# Altium PCB PCB.PcbDoc (part 2 of 2)
Units mm, origin at the board's own origin, x right, y up, seen from the top; angles counter-clockwise.
Board outline 65 x 70 mm, 2 copper layers (Top Layer, Bottom Layer), stack 0.325 mm thick; 95 components, 63 nets, 365 pads, 289 vias.
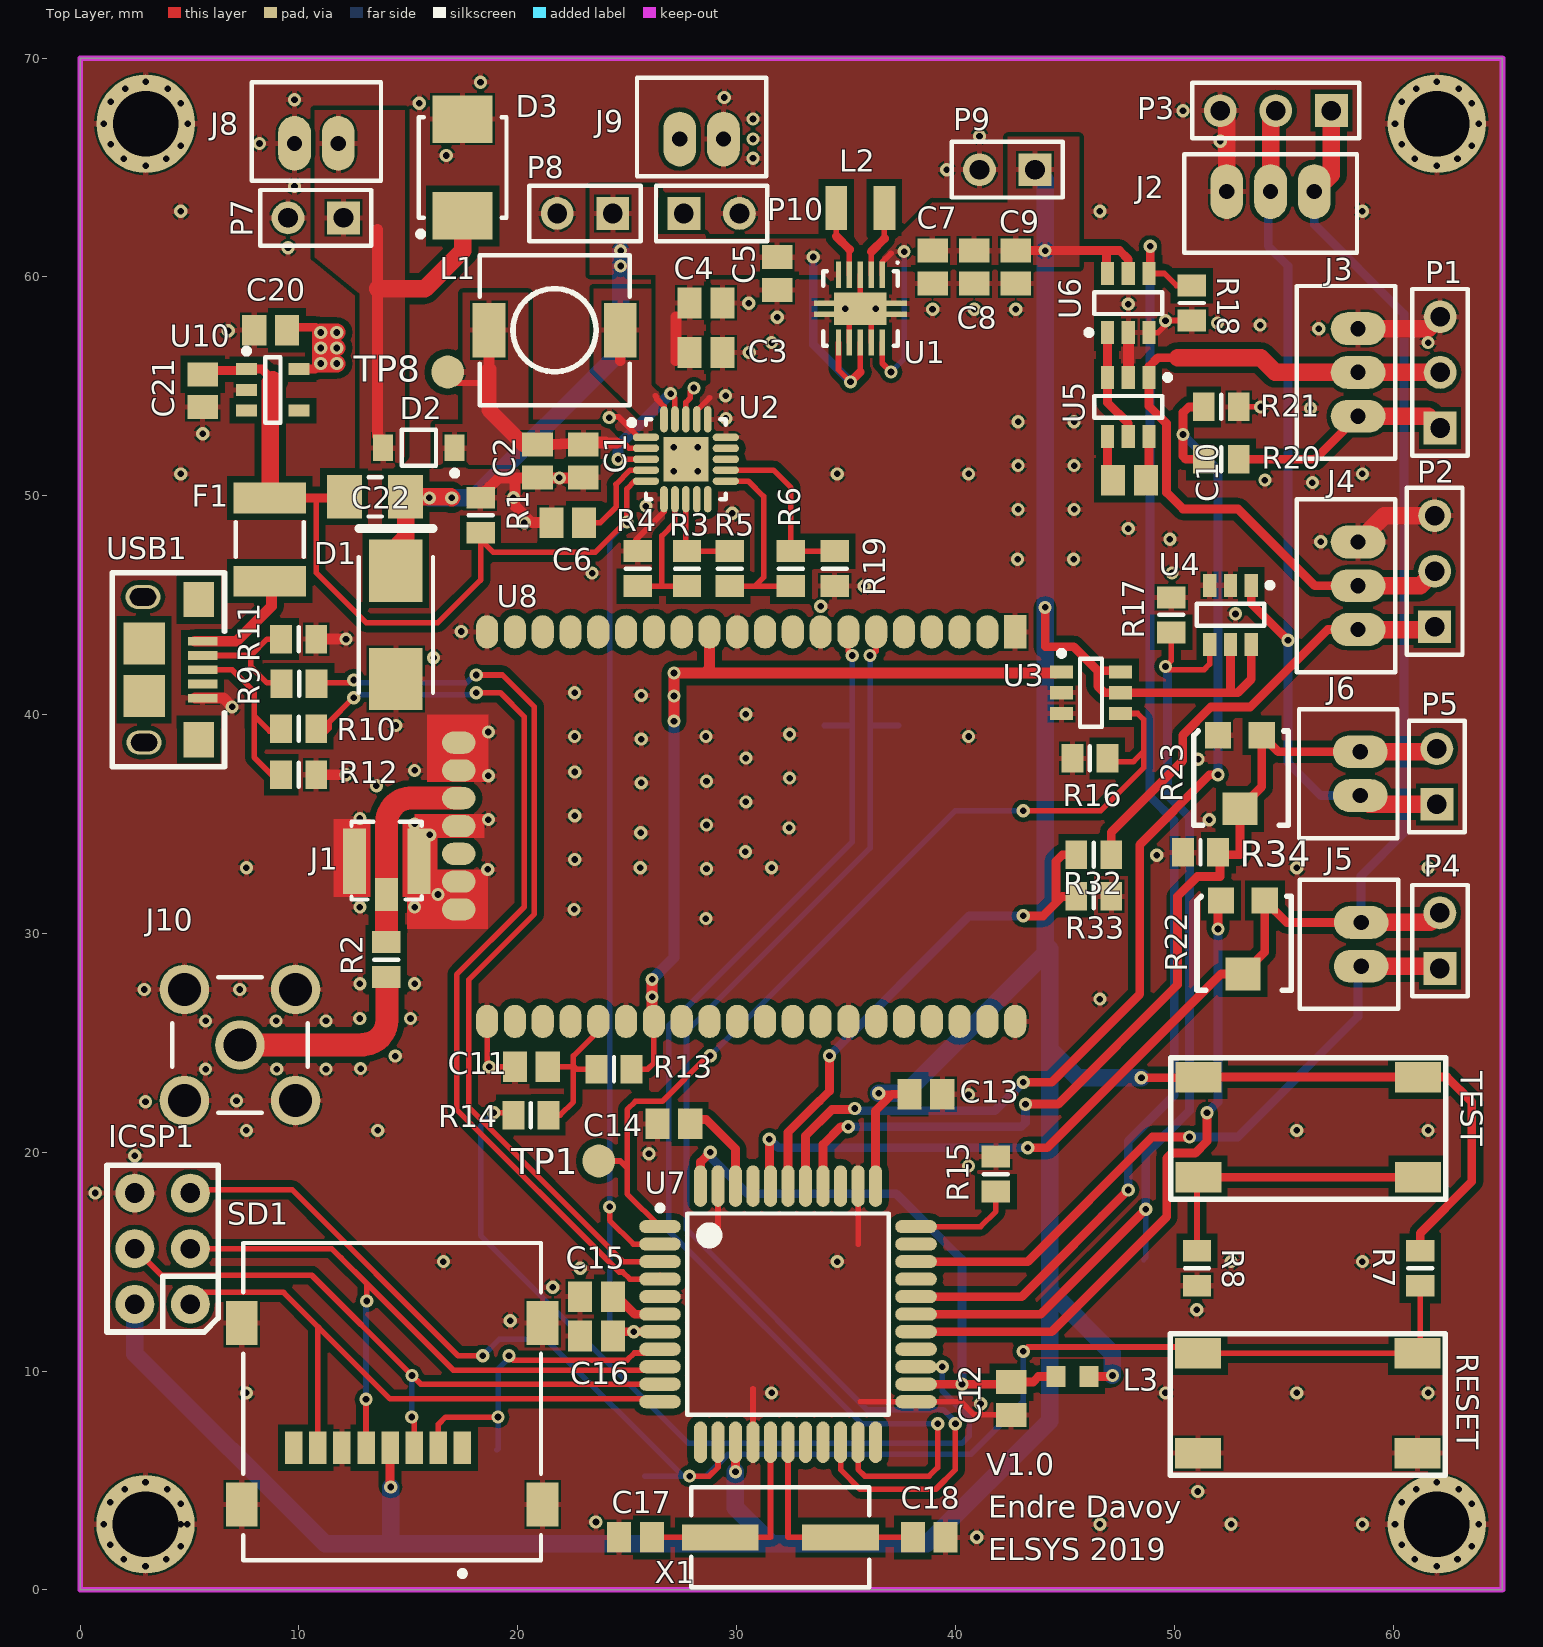
[diagram p0: Top Layer view]

## Silkscreen, mask and mechanical layers (free items; w line width, h text height) (continued)
Bottom Overlay: (continued)
  text "SOLAR" at 6.5,60.8 h1.8 r180
  text "COND" at 57.4,59.5 h1.8
  text "PH" at 55.3,57.1 h2 r90
  text "TURB" at 55,49.5 h1.8 r90
  text "TEMP" at 55,40.8 h1.8 r90
  text "COND" at 55.1,33.3 h1.8 r90